# Allegro board ESP333.brd
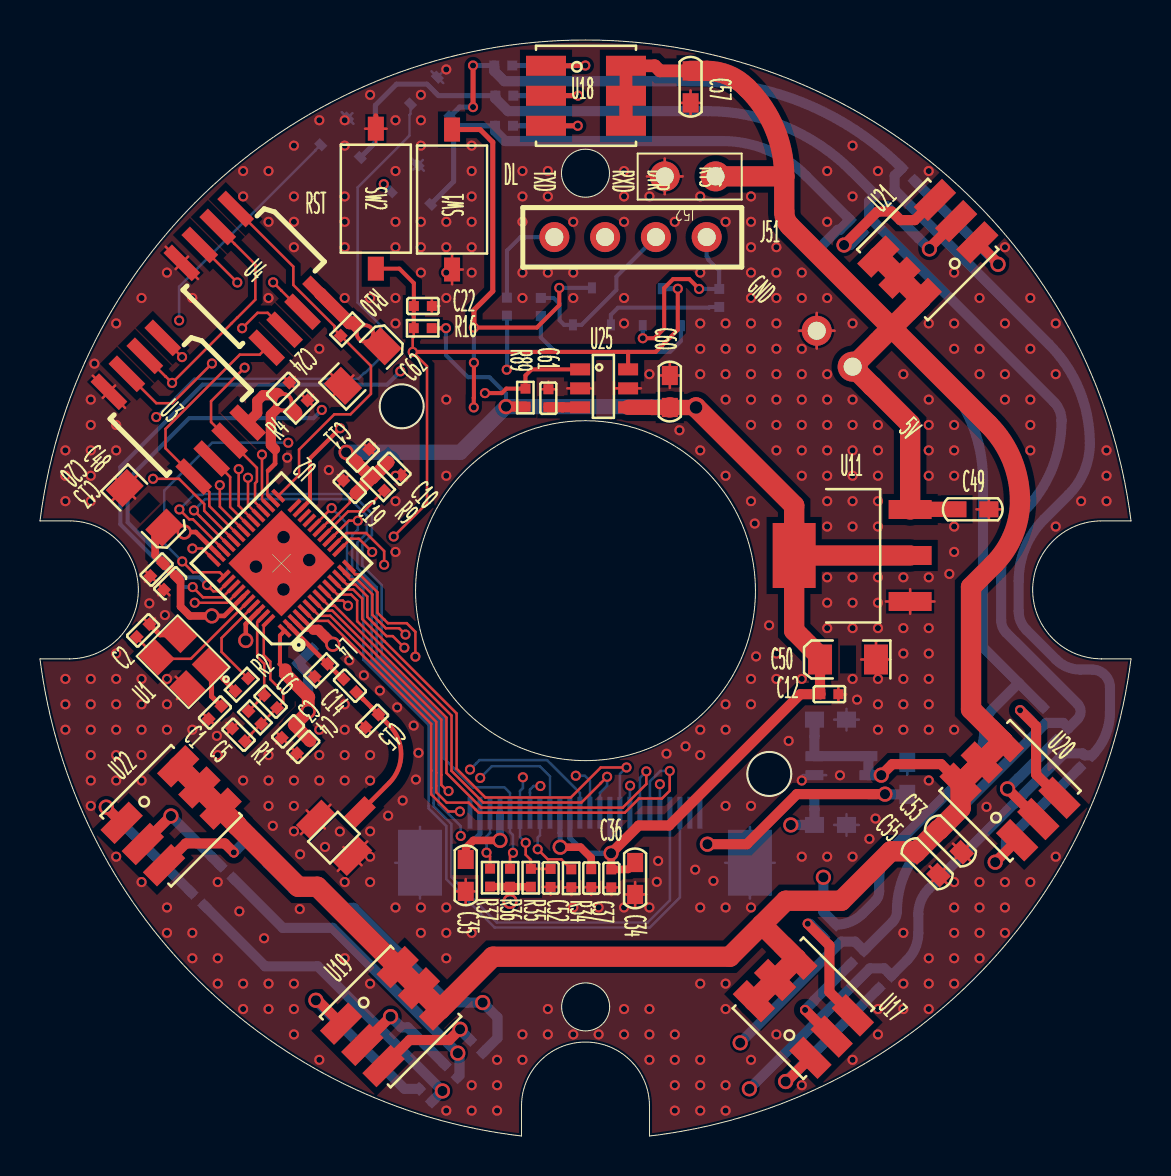
[diagram p0: board, top side]
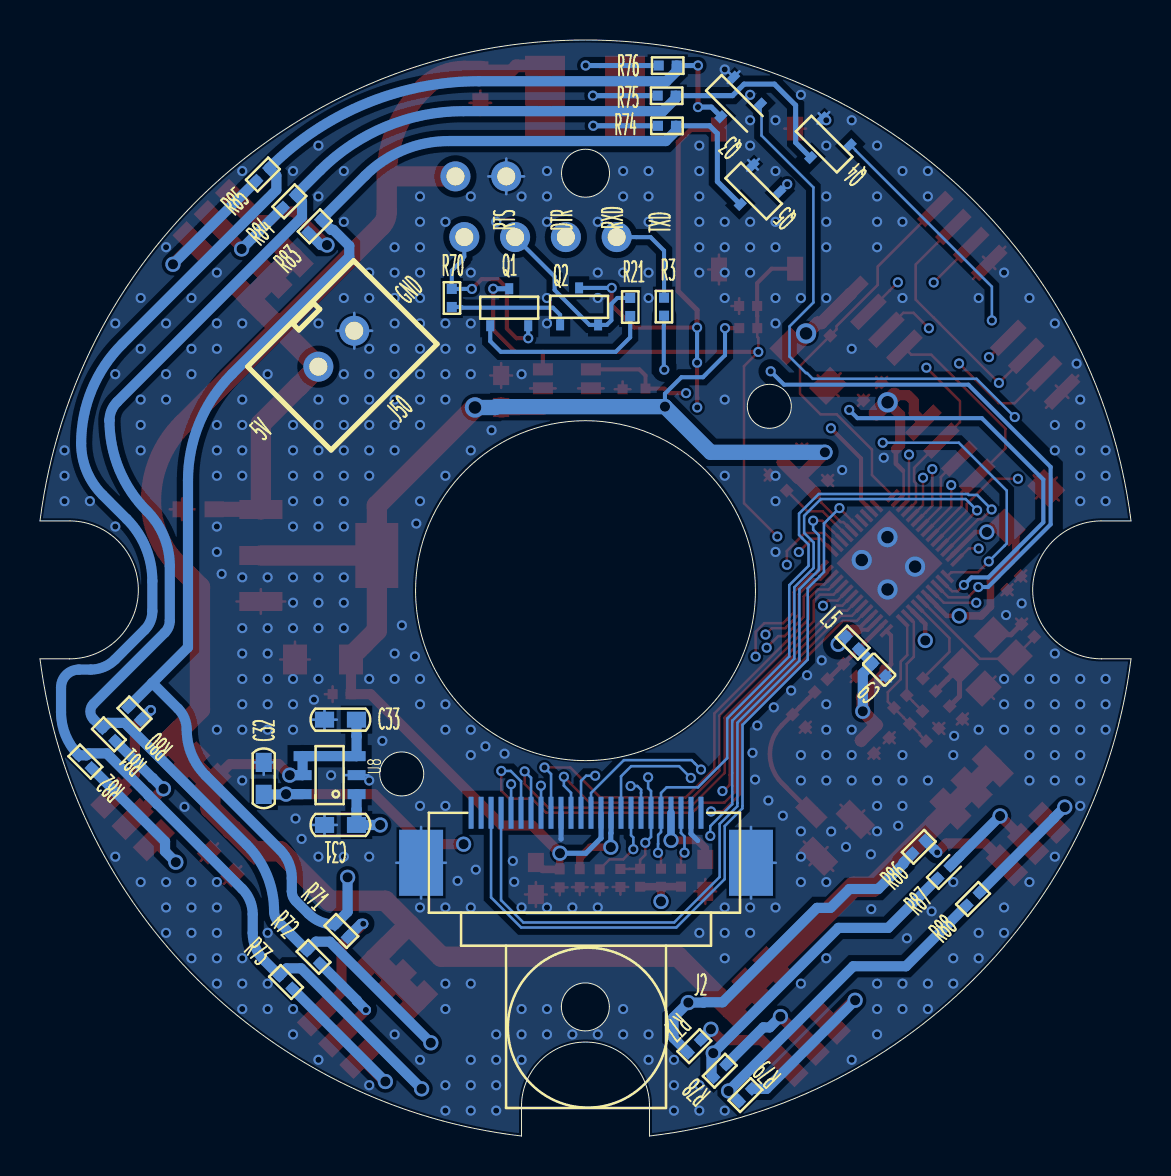
[diagram p1: board, bottom side, seen from below]

Outline 54.57 x 54.81 mm; copper layers: TOP, GND, SIG, BOTTOM. Coordinates in mm from the lower left corner of the outline.
Outline path: circle c18.09,36.49 r1.1 ; circle c27.28,48.15 r1.2 ; circle c36.47,18.11 r1.1 ; 0,30.76 arc(27.28,54.81) 54.57,30.76 53.06,30.76 arc(49.65,27.29) 53.1,23.86 54.57,23.86 arc(46.64,7.78) 30.48,0 30.48,1.5 arc(27.28,4.7) 24.08,1.5 24.08,0 arc(7.93,7.78) 0,23.86 1.47,23.86 arc(4.92,27.29) 1.51,30.76 0,30.76 ; 18.78,27.3 arc(27.28,35.8) 35.78,27.3 arc(27.28,18.8) 18.78,27.3 ; 26.09,6.46 arc(27.29,7.66) 28.49,6.46 arc(27.29,5.26) 26.09,6.46

## Design rules (mm)
net group DTR: nets DTR N16908429
net group RTS: nets N16908427 RTS
net group LED_B: nets LED_B N16960286 N16960785 N16961158 N16961522 N16961899 N16962291
net group LED_G: nets LED_G N16960306 N16960795 N16961160 N16961524 N16961901 N16962293
net group LED_R: nets LED_R N16960332 N16960797 N16961162 N16961526 N16961903 N16962295
net group RF: nets N16860839 N16860948 N16861170 N16861179 N16861214 N16861260 N16861530 N16861598 N16884685

## Placement (name value [footprint] x y rotation side)
C1  GRM1555C1H150JA01D  [C0402]  9.07 21.49 225 top
C2  GRM1555C1H150JA01D  [C0402]  4.84 24.96 45 top
C3  100pF/6.3V(10%)  [C0402]  12.73 20.55 225 top
C4  0.1uF/6.3V(10%)  [C0402]  13.49 19.78 225 top
C5  10nF/6.3V(10%)  [C0402]  10.25 19.75 135 top
C6  3.3nF/6.3V(10%)  [C0402]  11.22 22.04 315 top
C9  0.1uF/6.3V(10%)  [C0402]  12.92 23.64 225 bottom
C10  0.1uF/6.3V(10%)  [C0402]  17.41 33.69 315 top
C11  1uF/10V(20%)  [C0402]  15.83 33.71 45 top
C12  10uF/6.3V(20%)  [C0402]  39.03 22.1 0 top
C13  10uF/6.3V(20%)  [C0402]  6.84 27.96 225 top
C14  LQP15MN3N6B02D  [C0402]  15.19 22.84 314.3 top
C15  GRM1555C1H2R0BA01D  [C0402]  16.29 20.44 45 top
C19  0.1uF/6.3V(10%)  [C0402]  15.81 32.15 135 top
C20  1uF/10V(20%)  [C0402]  6.16 28.65 225 top
C22  1uF/10V(20%)  [C0402]  18.7 41.51 0 top
C24  1uF/10V(20%)  [C0402]  11.84 37.05 45 top
C31  10uF/10V(20%)  [C0603]  40.34 15.56 180 bottom
C32  10uF/10V(20%)  [C0603]  43.38 18.68 270 bottom
C33  10uF/10V(20%)  [C0603]  40.34 20.82 180 bottom
C34  4.7uF/10V(20%)  [C0603]  29.76 13.68 270 top
C35  4.7uF/10V(20%)  [C0603]  21.29 13.83 270 top
C36  0.1uF/16V(10%)  [C0402]  28.57 13.33 270 top
C37  1uF/10V(20%)  [C0402]  27.57 13.34 270 top
C48  47uF/6.3V(20%)  [C1206]  6.22 30.43 315 top
C49  10uF/16V  [C0603]  45.86 31.34 0 top
C50  22uF/16V  [C1206]  39.01 23.83 180 top
C52  1uF/10V(20%)  [C0402]  25.54 13.36 270 top
C53  0.1uF/16V  [C0603]  44.97 15.32 315 top
C55  0.1uF/16V  [C0603]  43.81 14.18 315 top
C57  0.1uF/16V  [C0603]  32.54 53.27 270 top
C60  0.1uF/16V  [C0603]  31.5 36.43 90 top
C61  220nF/6.3V  [C0402]  25.43 36.45 90 top
C62  47uF/10V(20%)  [C1206]  17.13 39.5 45 top
J2  FFC_24P_0P5  [OV9650FSL_PCB]  21.51 16.16 180 bottom
J39  IPEX  [ECT8180001581]  15.98 16.19 135 top
J50  CON2  [XH_2_54_2P]  40.64 38.48 135 bottom
J51  CON4  [CON_2_54_4P]  25.72 44.96 0 top
J52  CON2  [CON_2_54_2P]  33.79 47.99 180 top
L4  GRM1555C1H2R0BA01D  [R0402]  14.38 23.61 225 top
L5  2.0nH  [R0402]  14.25 24.99 225 bottom
Q1  S8050(NPN)  [SOT23-3]  31.1 42.38 180 bottom
Q2  S8050(NPN)  [SOT23-3]  27.6 42.42 180 bottom
Q3  S8050(NPN)  [SOT23-3]  20.51 50.97 45 bottom
Q4  S8050(NPN)  [SOT23-3]  16.02 48.93 45 bottom
Q5  S8050(NPN)  [SOT23-3]  19.54 46.59 45 bottom
R1  20K(5%)  [R0402]  10.43 21.25 315 top
R2  51R(5%)  [R0402]  9.77 22.25 45 top
R3  499R(1%)  [R0402]  23.35 41.03 90 bottom
R4  2K/NC  [R0402]  12.74 36.15 45 top
R9  10K(1%)(NC)  [R0402]  16.58 32.91 315 top
R10  10K(1%)  [R0402]  15.68 40.66 225 top
R16  10K(1%)  [R0402]  19.59 40.4 180 top
R21  12K(1%)  [R0402]  25.05 41.91 270 bottom
R34  10K(1%)  [R0402]  26.57 12.44 90 top
R35  10K(1%)  [R0402]  24.55 12.46 90 top
R36  3.3K(5%)  [R0402]  23.51 13.37 270 top
R37  3.3K(5%)  [R0402]  22.51 13.37 270 top
R70  12K(1%)  [R0402]  33.97 42.36 270 bottom
R71  100  [R0402]  39.82 10.57 225 bottom
R72  100  [R0402]  41.21 9.27 225 bottom
R73  100  [R0402]  42.58 8.02 225 bottom
R74  100  [R0402]  22.76 50.52 0 bottom
R75  100  [R0402]  22.77 52.03 0 bottom
R76  100  [R0402]  22.72 53.54 0 bottom
R77  100  [R0402]  22.15 4.17 135 bottom
R78  100  [R0402]  20.88 2.94 135 bottom
R79  100  [R0402]  19.6 1.72 135 bottom
R80  100  [R0402]  50.16 21.44 225 bottom
R81  100  [R0402]  51.44 20.4 225 bottom
R82  100  [R0402]  52.62 19.04 225 bottom
R83  100  [R0402]  40.51 45.82 315 bottom
R84  100  [R0402]  41.78 47.07 315 bottom
R85  100  [R0402]  43.1 48.41 315 bottom
R86  100  [R0402]  10.93 14.14 135 bottom
R87  100  [R0402]  9.67 12.88 135 bottom
R88  100  [R0402]  8.22 11.53 135 bottom
R89  10K(1%)  [R0402]  24.28 36.48 90 top
SW1  SW PUSHBUTTON  [KEY_3X6]  20.61 43.33 90 top
SW2  SW PUSHBUTTON  [KEY_3X6]  16.8 50.38 270 top
U1  40MHz+/-10ppm  [CRY_3225]  7.38 22.38 135 top
U2  ESP32-D0WD  [SLP48_5X5]  12.08 28.64 135 top
U3  EN25QH128A  [RZ7889]  4.77 34.18 315 top
U4  PSRAM64H  [RZ7889]  8.41 40.63 315 top
U8  RT9011-BM-PJ6  [SOT-23-6]  40.08 18.05 90 bottom
U11  TLV1117-33IDCY  [SOT223]  43.52 26.73 90 top
U17  RGB  [RGB_6]  38.18 6.39 315 top
U18  RGB  [RGB_6]  27.31 52.02 180 top
U19  RGB  [RGB_6]  17.53 5.97 225 top
U20  RGB  [RGB_6]  48.52 17.27 315 top
U21  RGB  [RGB_6]  44.4 44.34 45 top
U22  RGB  [RGB_6]  6.56 16.02 225 top
U25  TPS3813K33DBVT  [SOT23-6]  27.01 38.34 0 top

## Library data of the parts
C1-C6 C9-C15 C19 C20 C22 C24 C31-C37 C48-C50 C52 C53 C55 C57 C60-C62 = CAP NP
J2 = CON24_4
J39 = IPEX_0
J50 J52 = CON2
J51 = CON4
L4 L5 = CHOKE
Q1-Q5 = NPN BCE_2
R1-R4 R9 R10 = RESISTOR
R16 R89 = RESISTOR_0: signal model: DEFAULT_RESISTOR_10000OHM_1_2
R21 R34-R37 R70-R88 = RESISTOR_0: signal model: DEFAULT_RESISTOR_200OHM_1_2
SW1 = SW PUSHBUTTON_0
SW2 = SW PUSHBUTTON
U1 = X1_1
U2 = ESP8080_24
U3 = FLASH_3
U4 = PN18S32
U8 = NCP1117_3
U11 = TLV1117-33IDCY
U17-U22 = LED_RGB
U25 = TPS3813K33DBVT

## Footprints (pads in the part's own frame, mm; a bottom-side part is the same pattern mirrored in y, then rotated)
C0402
  rect 0.5x0.5 smd: 1(0,0) 2(0.9,0)
C0603
  rect 0.96x0.8 smd: 1(0,0) 2(1.6,0)
C1206
  rect 1.2x1.5 smd: 1(0,0) 2(-2.8,0)
CON_2_54_2P
  round 1.5 hole 0.9: 1(0,0) 2(2.54,0)
CON_2_54_4P
  round 1.5 hole 0.9: 1(0,0) 2(2.54,0) 3(5.08,0) 4(7.62,0)
CRY_3225
  rect 1.4x1.2 smd: 1(0,-1.6) 2(2.2,-1.6) 3(2.2,0) 4(0,0)
ECT8180001581
  rect 0.8x1.5 smd: 1(0,0)
  rect 1x1.8 smd: 2(-1.3,1.8) 3(1.3,1.8)
KEY_3X6
  rect 1.2x0.8 smd: 1(0,0) 2(7,0)
OV9650FSL_PCB
  rect 0.25x1.6 smd: 1(0,0) 2(-0.5,0) 3(-1,0) 4(-1.5,0) 5(-2,0) 6(-2.5,0) 7(-3,0) 8(-3.5,0) 9(-4,0) 10(-4.5,0) 11(-5,0) 12(-5.5,0) 13(-6,0) 14(-6.5,0) 15(-7,0) 16(-7.5,0) 17(-8,0) 18(-8.5,0) 19(-9,0) 20(-9.5,0) 21(-10,0) 22(-10.5,0) 23(-11,0) 24(-11.5,0)
  rect 2.2x3.3 smd: 25(-14,-2.5) 26(2.5,-2.5)
R0402
  rect 0.5x0.5 smd: 1(0,0) 2(0.9,0)
RGB_6
  rect 2x1 smd: 1(2,-1.5) 2(2,0) 3(2,1.5) 4(-2,1.5) 5(-2,0) 6(-2,-1.5)
RZ7889
  rect 2x0.6 smd: 1(-3.082,5.025) 2(-3.082,3.755) 3(-3.082,2.485) 4(-3.082,1.215) 5(2.918,1.215) 6(2.918,2.485) 7(2.918,3.755) 8(2.918,5.025)
SLP48_5X5
  rect 0.8x0.2 smd: 1(-2.5,2.275) 2(-2.5,1.925) 3(-2.5,1.575) 4(-2.5,1.225) 5(-2.5,0.875) 6(-2.5,0.525) 7(-2.5,0.175) 8(-2.5,-0.175) 9(-2.5,-0.525) 10(-2.5,-0.875) 11(-2.5,-1.225) 12(-2.5,-1.575) 13(-2.5,-1.925) 14(-2.5,-2.275) 25(2.5,-2.275) 26(2.5,-1.925) 27(2.5,-1.575) 28(2.5,-1.225) 29(2.5,-0.875) 30(2.5,-0.525) 31(2.5,-0.175) 32(2.5,0.175) 33(2.5,0.525) 34(2.5,0.875) 35(2.5,1.225) 36(2.5,1.575) 37(2.5,1.925) 38(2.5,2.275)
  rect 0.2x0.8 smd: 15(-1.575,-2.5) 16(-1.225,-2.5) 17(-0.875,-2.5) 18(-0.525,-2.5) 19(-0.175,-2.5) 20(0.175,-2.5) 21(0.525,-2.5) 22(0.875,-2.5) 23(1.225,-2.5) 24(1.575,-2.5) 39(1.575,2.5) 40(1.225,2.5) 41(0.875,2.5) 42(0.525,2.5) 43(0.175,2.5) 44(-0.175,2.5) 45(-0.525,2.5) 46(-0.875,2.5) 47(-1.225,2.5) 48(-1.575,2.5)
  rect 3.75x3.75 smd: 49(0,0)
SOT23-3
  rect 0.4x0.55 smd: 1(-0.95,-1.85) 2(0.95,-1.85) 3(0,0)
SOT23-6
  rect 1x0.6 smd: 1(0,0) 2(0,-0.95) 3(0,-1.9) 4(2.4,-1.9) 5(2.4,-0.95) 6(2.4,0)
SOT223
  rect 0.95x2.15 smd: 1(0,0) 2(2.3,0) 3(4.6,0)
  rect 3.25x2.15 smd: 4(2.3,5.8)
SOT-23-6
  rect 0.5x0.9 smd: 1(-0.95,-1.35) 2(0,-1.35) 3(0.95,-1.35) 4(0.95,1.35) 5(0,1.35) 6(-0.95,1.35)
XH_2_54_2P
  round 1.5 hole 0.9: 1(0,0) 2(2.54,0)

## Nets
AGND: C1.2 C2.2 C3.2 C4.2 C5.2 C9.2 C10.2 C11.2 C12.2 C13.2 C15.1 C19.2 C20.2 C22.2 C24.2 C31.1 C32.1 C33.1 C34.2 C35.2 C36.2 C37.2 C48.2 C49.2 C50.2 C52.2 C53.2 C55.2 C57.2 C60.2 C61.2 C62.2 J2.2(AGND) J2.15(DGND) J2.25(GND#25) J2.26(GND#26) J39.2(GND1) J39.3(GND2) J50.2 J52.2 L4.2 Q3.2(E) Q4.2(E) Q5.2(E) R4.2 R34.1 SW1.1 SW2.1 U1.2(GND#2) U1.4(GND#4) U2.49(GND) U3.4(GND) U4.4(VSS) U8.2(GND) U11.1(ADJ/GND) U25.2(GND) U25.5(WDR)
AVDD_2V8: C31.2 C35.1 J2.4(AVDD) U8.1(VOUT2)
DVDD_1V3: C32.2 C37.1 J2.10(DVDD) U8.6(VOUT1)
VBUS: C33.2 C49.1 C53.1 C55.1 C57.1 J50.1 J52.1 U8.3(EN2) U8.4(EN1) U8.5(VIN) U11.3(INPUT) U17.4(BA) U17.5(GA) U17.6(RA) U18.4(BA) U18.5(GA) U18.6(RA) U19.4(BA) U19.5(GA) U19.6(RA) U20.4(BA) U20.5(GA) U20.6(RA) U21.4(BA) U21.5(GA) U21.6(RA) U22.4(BA) U22.5(GA) U22.6(RA)
VDD_SDIO: C24.1 C62.1 R4.1 R10.1 U2.26(VDD_SDIO) U3.8(VCC) U4.8(VDD)
B: Q5.1(B) U2.34(GPIO5)
CAM_RESET: C52.1 J2.6(RESET) R35.2 U2.13(32K_XN)
DOVDD_3V3: C3.1 C4.1 C9.1 C10.1 C11.1 C12.1 C13.1 C19.1 C20.1 C34.1 C36.1 C48.1 C50.1 C60.1 J2.11(DOVDD) L5.2 R9.1 R16.1 R35.1 R36.2 R37.2 R89.1 U2.1(VDDA#1) U2.19(VDD3P3_RTC) U2.37(VDD3P3_CPU) U2.43(VDDA#43) U2.46(VDDA#46) U11.2(OUTPUT#2) U11.4(OUTPUT#4) U25.4(VCC)
DTR: J51.3 Q2.2(E) R21.1
DVP_HREF: J2.9(HREF) U2.5(SENSOR_VP)
DVP_PCLK: J2.17(PCLK) U2.12(32K_XP)
DVP_VSYNC: J2.7(VSYNC) U2.15(GPIO26)
DVP_Y2: J2.19(Y2) U2.6(SENSOR_CAPP)
DVP_Y3: J2.21(Y3) U2.17(MTMS)
DVP_Y4: J2.22(Y4) U2.20(MTCK)
DVP_Y5: J2.20(Y5) U2.16(GPIO27)
DVP_Y6: J2.18(Y6) U2.8(SENSOR_VN)
DVP_Y7: J2.16(Y7) U2.11(VDET_2)
DVP_Y8: J2.14(Y8) U2.10(VDET_1)
DVP_Y9: J2.12(Y9) U2.7(SENSOR_CAPN)
EN: C22.1 Q1.3(C) R16.2 SW2.2 U2.9(CHIP_PU) U25.6(R\E\S\E\T\)
FLASH_CLK: U2.31(SD_CLK) U3.6(CLK)
G: Q4.1(B) U2.38(GPIO19)
I2C_SCL: J2.5(SCL) R36.1 U2.36(GPIO23)
I2C_SDA: J2.3(SDA) R37.1 U2.35(GPIO18)
IO0: Q2.3(C) SW1.2 U2.23(GPIO0)
IO4: U2.24(GPIO4)
IO12: R9.2 U2.18(MTDI)
IO16: R10.2 U2.25(GPIO16) U4.1(CS#)
IO17: U2.27(GPIO17) U4.6(SCLK)
IO21: Q3.1(B) U2.42(GPIO21)
IO25: J2.13(XCLK) U2.14(GPIO25)
LED_B: Q5.3(C) R71.1 R74.1 R77.1 R80.1 R83.1 R86.1
LED_G: Q4.3(C) R72.1 R75.1 R78.1 R81.1 R84.1 R87.1
LED_R: Q3.3(C) R73.1 R76.1 R79.1 R82.1 R85.1 R88.1
PWDN: J2.8(PWDN) R34.2
RTS: J51.4 Q1.2(E) R70.1
RXD0: J51.2 U2.40(U0RXD)
SCS/CMD: U2.30(SD_CMD) U3.1(/CS)
SDI/SD1: U2.33(SD_DATA_1) U3.5(DI) U4.5(SI/SIO0)
SDO/SD0: U2.32(SD_DATA_0) U3.2(DO) U4.2(SO/SIO1)
SHD/SD2: U2.28(SD_DATA_2) U3.7(/HOLD) U4.7(SIO3)
SWP/SD3: U2.29(SD_DATA_3) U3.3(/WP) U4.3(SIO2)
TXD0: J51.1 R3.2
WDI: R89.2 U2.39(GPIO22) U25.1(WDI)
N16860839: C5.1 C6.2 R1.2 U2.48(CAP1)
N16860948: L5.1 U2.3(VDD3P3#3) U2.4(VDD3P3#4)
N16861170: C14.2 C15.2 J39.1(RF)
N16861179: C2.1 U1.3(XOUT) U2.44(XTAL_N)
N16861214: C1.1 R2.1 U1.1(XIN)
N16861260: C6.1 R1.1 U2.47(CAP2)
N16861530: R3.1 U2.41(U0TXD)
N16861598: R2.2 U2.45(XTAL_P)
N16884685: C14.1 L4.1 U2.2(LNA_IN)
N16908427: Q2.1(B) R70.2
N16908429: Q1.1(B) R21.2
N16960286: R71.2 U17.3(BK)
N16960306: R72.2 U17.2(GK)
N16960332: R73.2 U17.1(RK)
N16960785: R74.2 U18.3(BK)
N16960795: R75.2 U18.2(GK)
N16960797: R76.2 U18.1(RK)
N16961158: R77.2 U19.3(BK)
N16961160: R78.2 U19.2(GK)
N16961162: R79.2 U19.1(RK)
N16961522: R80.2 U20.3(BK)
N16961524: R81.2 U20.2(GK)
N16961526: R82.2 U20.1(RK)
N16961899: R83.2 U21.3(BK)
N16961901: R84.2 U21.2(GK)
N16961903: R85.2 U21.1(RK)
N16962291: R86.2 U22.3(BK)
N16962293: R87.2 U22.2(GK)
N16962295: R88.2 U22.1(RK)
N16988764: C61.1 U25.3(WDT)

Pads without a net: J2 1 23 24; U2 21 22

## Via types
v1: diameter 0.508, hole 0.305, TOP to BOTTOM, 466 vias
v2: diameter 0.762, hole 0.508, TOP to BOTTOM, 32 vias
v3: diameter 1.016, hole 0.635, TOP to BOTTOM, 7 vias

## Routing (per net, layer and track width the routed paths; a pad name or vN(x,y) marks a point on that pad's centre or on a via; arc(x,y) is an arc through that point)
AGND: length 130.4
  TOP w0.127: 46.84,31.34 C49.2 ; C49.2 47.46,31.88 ; C49.2 48.08,31.34 ; C49.2 47.46,30.8 ; SW1.1 21.15,43.33 ; SW1.1 20.61,44.07 ; SW1.1 20.61,42.6 ; C53.2 46.48,14.57 ; C53.2 46.54,13.75 ; C53.2 45.66,14.63 ; C53.2 45.72,13.81 ; C36.2 28.96,12.43 ; C36.2 28.18,12.43 ; C36.2 28.57,12.04 ; 26.37,37.39 U25.2 27.65,37.39 ; 6.78,43.36 U4.4 ; U4.4 6.29,44.47 ; U4.4 7.9,42.86 ; U4.4 7.4,43.98 ; 5.75,25.87 C2.2 5.2,25.87 ; 27.18,12.44 C37.2 ; C37.2 27.57,12.06 ; C37.2 27.96,12.44 ; C48.2 4.76,31.88 ; C48.2 3.61,31.78 ; C48.2 3.71,32.93 ; C48.2 4.87,33.04 ; 42.3,26.73 U11.1 ; U11.1 44.73,26.73 ; U11.1 43.52,27.35 ; U11.1 43.52,26.12 ; 5.92,27.6 C13.2 ; C13.2 6.47,27.05 ; C13.2 5.92,27.05 ; 44.55,12.67 C55.2 ; C55.2 45.37,12.61 ; C55.2 45.32,13.43 ; C55.2 44.5,13.49 ; C50.2 42.55,23.83 ; C50.2 41.81,24.72 ; C50.2 41.07,23.83 ; C50.2 41.81,22.94 ; C22.2 19.99,41.51 ; C22.2 19.6,41.12 ; C22.2 19.6,41.9 ; 25.15,12.46 C52.2 ; C52.2 25.54,12.07 ; C52.2 25.93,12.46 ; 9.34,20.66 C5.2 ; C5.2 9.34,20.11 ; C5.2 9.89,20.66 ; J39.2 16.36,14.73 ; J39.2 16.08,13.54 ; J39.2 14.89,13.26 ; J39.2 15.18,14.45 ; C24.2 12.75,37.41 ; C24.2 12.2,37.96 ; C24.2 12.75,37.96 ; C11.2 16.74,34.08 ; C11.2 16.19,34.63 ; C11.2 16.74,34.63 ; C19.2 15.45,33.06 ; C19.2 14.9,33.06 ; C19.2 14.9,32.51 ; R4.2 13.65,36.51 ; R4.2 13.65,37.07 ; R4.2 13.1,37.07 ; 30.36,47.99 J52.2 ; J52.2 32.14,47.99 ; J52.2 31.25,47.1 ; J52.2 31.25,48.88 ; 14.01,22.7 L4.2 13.46,23.25 ; C1.2 8.71,20.58 ; C1.2 8.16,21.13 ; C1.2 8.16,20.58 ; 18.32,33.33 C10.2 18.32,32.78 ; 30.05,37.39 U25.5 28.77,37.39 ; C4.2 13.13,18.86 ; C4.2 12.58,18.86 ; C4.2 12.58,19.42 ; 26.18,12.44 R34.1 ; R34.1 26.96,12.44 ; R34.1 26.57,12.05 ; 20.75,12.23 C35.2 ; C35.2 21.83,12.23 ; C35.2 21.29,11.61 ; C35.2 21.29,12.85 ; J39.3 14.24,15.38 ; J39.3 13.06,15.1 ; J39.3 14.53,16.57 ; J39.3 13.34,16.29 ; C57.2 33.08,51.67 ; C57.2 32.54,51.05 ; C57.2 32,51.67 ; C57.2 32.54,52.29 ; 30.96,38.03 C60.2 ; C60.2 31.5,38.65 ; C60.2 31.5,37.41 ; C60.2 32.04,38.03 ; U3.4 3.76,37.53 ; U3.4 4.25,36.42 ; U3.4 2.64,38.03 ; U3.4 3.14,36.91 ; 37.96,40.27 J50.2 ; J50.2 38.85,39.38 ; J50.2 39.74,40.27 ; J50.2 38.85,41.16 ; 5.24,27.73 C20.2 ; C20.2 5.8,27.73 ; C20.2 5.24,28.29 ; C12.2 39.93,22.49 ; C12.2 39.93,21.71 ; C12.2 40.32,22.1 ; 6.78,22.98 U1.4 6.85,21.86 ; C3.2 12.37,19.64 ; C3.2 11.82,19.64 ; C3.2 11.82,20.19 ; 29.76,11.46 C34.2 ; C34.2 30.3,12.08 ; C34.2 29.76,12.7 ; C34.2 29.22,12.08 ; C62.2 15.68,38.04 ; C62.2 14.52,38.15 ; C62.2 14.63,36.99 ; 16.8,49.64 SW2.1 ; SW2.1 16.26,50.38 ; SW2.1 17.34,50.38 ; C15.1 16.57,20.17 ; C15.1 16.01,20.17 ; C15.1 16.01,20.72 ; 25.04,37.35 C61.2 ; C61.2 25.43,37.74 ; C61.2 25.82,37.35
  TOP w0.254: U1.2 6,25.07 C2.2 ; 16.8,51.02 SW2.1
  GND w0.127: 31.25,47.1 J52.2 ; J52.2 30.36,47.99 ; J52.2 32.14,47.99 ; J52.2 31.25,48.88 ; 37.96,40.27 J50.2 ; J50.2 38.85,41.16 ; J50.2 38.85,39.38 ; J50.2 39.74,40.27
  SIG w0.127: J50.2 38.85,41.16 ; J50.2 38.85,39.38 ; J50.2 37.96,40.27 ; J50.2 39.74,40.27 ; J52.2 31.25,48.88 ; J52.2 32.14,47.99 ; J52.2 30.36,47.99 ; J52.2 31.25,47.1
  BOTTOM w0.127: 39.72,15.56 C31.1 ; C31.1 40.34,15.02 ; C31.1 40.34,16.1 ; C31.1 40.95,15.56 ; J2.26 19.01,15.45 ; J2.26 17.77,13.66 ; J2.26 19.01,11.88 ; C33.1 40.96,20.82 ; C33.1 40.34,21.36 ; C33.1 40.34,20.28 ; C33.1 39.72,20.82 ; Q5.2 19.15,48.81 ; Q5.2 19.2,48.28 ; Q5.2 18.66,48.33 ; Q5.2 18.61,48.86 ; 34.27,13.66 J2.25 ; J2.25 36.75,13.66 ; J2.25 35.51,11.88 ; J2.25 35.51,15.45 ; 42.84,18.68 C32.1 ; C32.1 43.91,18.68 ; C32.1 43.38,18.06 ; Q4.2 15.68,50.62 ; Q4.2 15.62,51.15 ; Q4.2 15.09,51.21 ; 39.32,18.05 U8.2 38.14,18.05 ; 38.85,39.38 J50.2 ; J50.2 38.85,41.16 ; J50.2 37.96,40.27 ; J50.2 39.74,40.27 ; J52.2 31.25,48.88 ; J52.2 31.25,47.1 ; J52.2 30.36,47.99 ; J52.2 32.14,47.99 ; Q3.2 20.11,53.19 ; Q3.2 20.17,52.66 ; Q3.2 19.58,53.25 ; 12,23.28 C9.2 ; C9.2 12.55,22.73 ; C9.2 12,22.73
  BOTTOM w0.254: J2.2 22.01,15.11 21.67,14.77 ; 28.5,14.85 28.51,14.86 J2.15
  BOTTOM w0.381: C32.1 43.38,18.86
  vias: v1(1.27,34.29) v1(1.27,33.02) v1(1.27,31.75) v1(1.27,22.86) v1(1.27,21.59) v1(1.27,20.32) v1(2.54,36.83) v1(2.54,35.56) v1(2.54,34.29) v1(2.54,33.02) v1(2.54,31.75) v1(2.54,22.86) v1(2.54,21.59) v1(2.54,20.32) v1(2.54,19.05) v1(2.54,17.78) v1(2.54,16.51) v1(2.72,38.63) v1(3.81,40.64) v1(3.81,35.56) v1(3.81,34.29) v1(3.81,24.13) v1(3.81,22.86) v1(3.81,21.59) v1(3.81,20.32) v1(3.81,19.05) v1(3.81,17.78) v1(3.81,13.97) v1(5.08,41.91) v1(5.08,22.86) v1(5.08,21.59) v1(5.08,20.32) v1(5.08,19.05) v1(5.08,17.78) v1(5.08,12.7) v1(5.47,26.64) v1(6.25,26.05) v1(6.35,43.18) v1(6.35,22.86) v1(6.35,21.59) v1(6.35,20.32) v1(6.35,11.43) v1(6.35,10.16) v1(7.62,41.91) v1(7.62,20.32) v1(7.62,10.16) v1(7.62,8.89) v1(8.85,20.01) v1(8.89,19.05) v1(8.89,12.7) v1(8.89,8.89) v1(8.89,7.62) v1(9.97,11.24) v1(10.16,48.26) v1(10.16,46.99) v1(10.16,17.78) v1(10.16,7.62) v1(10.16,6.35) v1(11.21,9.89) v1(11.43,48.26) v1(11.43,45.72) v1(11.43,41.91) v1(11.43,19.05) v1(11.43,17.78) v1(11.43,16.51) v1(11.43,7.62) v1(11.43,6.35) v1(11.64,15.51) v1(12.37,33.92) v1(12.7,49.53) v1(12.7,46.99) v1(12.7,45.72) v1(12.7,44.45) v1(12.7,17.78) v1(12.7,16.51) v1(12.7,15.24) v1(12.7,7.62) v1(12.7,6.35) v1(12.7,5.08) v1(13.01,14.09) v1(12.99,11.35) v1(13.97,50.8) v1(13.97,39.37) v1(13.97,20.32) v1(13.97,19.05) v1(13.97,17.78) v1(13.97,3.81) v1(14.25,14.46) v1(14.45,33.31) v1(15,15.23) v1(15.24,50.8) v1(15.24,49.53) v1(15.24,46.99) v1(15.24,45.72) v1(15.24,44.45) v1(15.24,41.91) v1(15.24,21.59) v1(15.24,20.32) v1(15.24,19.05) v1(15.24,17.78) v1(15.24,12.7) v1(15.24,8.89) v1(15.47,23.79) v1(16.2,23.04) v1(16.51,52.07) v1(16.51,41.91) v1(16.51,19.05) v1(16.51,17.78) v1(16.51,15.24) v1(16.51,13.97) v1(16.51,12.7) v1(16.51,7.62) v1(17,22.28) v1(17.41,16.02) v1(17.78,50.8) v1(17.78,48.26) v1(17.78,45.72) v1(17.78,44.45) v1(17.78,41.91) v1(17.78,40.64) v1(17.78,33.02) v1(17.78,31.75) v1(17.78,29.21) v1(17.78,11.43) v1(17.87,21.44) v1(18.14,16.78) v1(18.69,20.53) v1(18.8,17.83) v1(18.93,19.16) v1(19.05,52.07) v1(19.05,50.8) v1(19.05,49.53) v1(19.05,45.72) v1(19.05,44.45) v1(19.05,43.18) v1(19.05,11.43) v1(19.05,10.16) v1(20.32,53.34) v1(20.32,45.72) v1(20.32,44.45) v1(20.32,43.18) v1(20.32,41.91) v1(20.32,36.83) v1(20.32,33.02) v1(20.32,11.43) v1(20.32,10.16) v1(20.32,8.89) v1(20.32,1.27) v1(21.59,49.53) v1(21.59,48.26) v1(21.59,46.99) v1(21.59,45.72) v1(21.59,44.45) v1(21.59,43.18) v1(21.59,10.16) v1(21.59,2.54) v1(21.59,1.27) v1(22.86,3.81) v1(22.86,2.54) v1(22.86,1.27) v1(24.13,48.26) v1(24.13,46.99) v1(24.13,45.72) v1(24.13,43.18) v1(24.13,41.91) v1(24.13,5.08) v1(24.13,3.81) v1(25.4,48.26) v1(25.4,46.99) v1(25.4,43.18) v1(25.4,6.35) v1(25.4,5.08) v1(26.67,45.72) v1(26.67,43.18) v1(26.67,41.91) v1(26.67,11.43) v1(26.67,5.08) v1(27.94,11.43) v1(27.94,5.08) v1(29.21,48.26) v1(29.21,46.99) v1(29.21,45.72) v1(29.21,41.91) v1(29.21,40.64) v1(29.21,11.43) v1(29.21,6.35) v1(29.21,5.08) v1(30.48,46.99) v1(30.48,38.1) v1(30.48,11.43) v1(30.48,6.35) v1(30.48,5.08) v1(30.48,3.81) v1(30.92,13.76) v1(30.85,12.71) v1(31.33,19.12) v1(31.75,45.72) v1(31.75,5.08) v1(31.75,3.81) v1(31.75,2.54) v1(31.75,1.27) v1(31.98,35.3) v1(32.29,19.49) v1(32.77,13.32) v1(33.02,46.99) v1(33.02,43.18) v1(33.02,40.64) v1(33.02,39.37) v1(33.02,38.1) v1(33.02,34.29) v1(33.02,20.32) v1(33.02,19.05) v1(33.02,11.43) v1(33.02,7.62) v1(33.02,3.81) v1(33.02,2.54) v1(33.02,1.27) v1(33.68,12.76) v1(34.29,45.72) v1(34.29,40.64) v1(34.29,39.37) v1(34.29,38.1) v1(34.29,36.83) v1(34.29,33.02) v1(34.29,21.59) v1(34.29,20.32) v1(34.29,16.51) v1(34.29,11.43) v1(34.29,7.62) v1(34.29,6.35) v1(34.29,2.54) v1(34.29,1.27) v1(35.56,46.99) v1(35.56,45.72) v1(35.56,44.45) v1(35.56,43.18) v1(35.56,41.91) v1(35.56,40.64) v1(35.56,39.37) v1(35.56,38.1) v1(35.56,36.83) v1(35.56,35.56) v1(35.56,31.75) v1(35.56,22.86) v1(35.56,21.59) v1(35.56,16.51) v1(35.56,11.43) v1(35.56,3.81) v1(35.75,30.63) v1(35.81,23.99) v1(36.47,25.54) v1(36.83,44.45) v1(36.83,43.18) v1(36.83,41.91) v1(36.83,40.64) v1(36.83,39.37) v1(36.83,38.1) v1(36.83,36.83) v1(36.83,35.56) v1(36.83,34.29) v1(36.83,24.13) v1(36.83,22.86) v1(36.83,5.08) v1(37.44,19.76) v1(38.1,43.18) v1(38.1,41.91) v1(38.1,39.37) v1(38.1,38.1) v1(38.1,36.83) v1(38.1,35.56) v1(38.1,34.29) v1(38.1,33.02) v1(38.1,22.86) v1(38.1,17.78) v1(38.1,13.97) v1(38.1,2.54) v1(39.37,48.26) v1(39.37,45.72) v1(39.37,41.91) v1(39.37,38.1) v1(39.37,36.83) v1(39.37,35.56) v1(39.37,34.29) v1(39.37,33.02) v1(39.37,31.75) v1(39.37,30.48) v1(39.37,27.94) v1(39.37,26.67) v1(39.37,25.4) v1(39.37,13.97) v1(40.01,18.04) v1(40.64,49.53) v1(40.64,46.99) v1(40.64,40.64) v1(40.64,36.83) v1(40.64,35.56) v1(40.64,34.29) v1(40.64,33.02) v1(40.64,31.75) v1(40.64,30.48) v1(40.64,27.94) v1(40.64,26.67) v1(40.64,25.4) v1(40.64,22.86) v1(40.64,13.97) v1(40.64,3.81) v1(40.86,21.82) v1(41.48,14.86) v1(41.79,15.88) v1(41.91,48.26) v1(41.91,35.56) v1(41.91,34.29) v1(41.91,33.02) v1(41.91,31.75) v1(41.91,30.48) v1(41.91,27.94) v1(41.91,26.67) v1(41.91,25.4) v1(41.91,22.86) v1(41.91,21.59) v1(41.91,20.32) v1(41.91,6.35) v1(41.91,5.08) v1(43.18,38.1) v1(43.18,27.94) v1(43.18,25.4) v1(43.18,24.13) v1(43.18,22.86) v1(43.18,21.59) v1(43.18,20.32) v1(43.18,10.16) v1(43.18,7.62) v1(43.18,6.35) v1(44.45,48.26) v1(44.45,40.64) v1(44.45,36.83) v1(44.45,35.56) v1(44.45,34.29) v1(44.45,33.02) v1(44.45,27.94) v1(44.45,25.4) v1(44.45,24.13) v1(44.45,22.86) v1(44.45,21.59) v1(44.45,20.32) v1(44.45,17.78) v1(44.45,8.89) v1(44.45,7.62) v1(44.45,6.35) v1(45.48,28.11) v1(45.72,43.18) v1(45.72,40.64) v1(45.72,39.37) v1(45.72,35.56) v1(45.72,34.29) v1(45.72,33.02) v1(45.72,30.48) v1(45.72,29.21) v1(45.72,20.32) v1(45.72,12.7) v1(45.72,11.43) v1(45.72,10.16) v1(45.72,8.89) v1(45.72,7.62) v1(46.99,41.91) v1(46.99,39.37) v1(46.99,38.1) v1(46.99,12.7) v1(46.99,11.43) v1(46.99,10.16) v1(46.99,8.89) v1(47.34,16.46) v1(48.26,44.45) v1(48.26,40.64) v1(48.26,38.1) v1(48.26,36.83) v1(48.26,12.7) v1(48.26,11.43) v1(48.26,10.16) v1(49.53,41.91) v1(49.53,39.37) v1(49.53,36.83) v1(49.53,35.56) v1(49.53,34.29) v1(49.53,12.7) v1(50.8,40.64) v1(50.8,38.1) v1(50.8,30.48) v1(50.8,13.97) v1(52.07,31.75) v1(53.34,34.29) v1(53.34,33.02) v1(53.34,31.75) v3(10.8,28.48) v3(12.18,29.95) v3(12.18,27.33) v3(13.47,28.81)
AVDD_2V8: length 21.4
  TOP w0.381: v2(23,14.78) 21.67,14.78 21.29,14.4 C35.1
  SIG w0.508: v2(37.55,15.56) 23.78,15.56 v2(23,14.78)
  BOTTOM w0.381: v2(23,14.78) 23.01,14.79 J2.4
  BOTTOM w0.508: U8.1 38.73,16.34 38.74,16.34 C31.2 v2(37.55,15.56)
DVDD_1V3: length 23.6
  TOP w0.381: C37.1 27.57,13.91 27.04,14.45 v2(26.02,14.45)
  TOP w0.508: v2(33.38,14.59) 35.35,14.59 37.86,17.1 v2(42.26,17.1)
  SIG w0.381: v2(33.38,14.59) 32.68,14.59 32.34,14.94 26.51,14.94 v2(26.02,14.45)
  BOTTOM w0.254: J2.10 26.01,15.16 26.02,15.15 v2(26.02,14.45)
  BOTTOM w0.508: C32.2 42.27,17.08 v2(42.26,17.1) U8.6
VBUS: length 143.9
  TOP w0.508: U20.6 45.07,18.6 42.63,18.6 v2(42.08,18.05)
  TOP w0.635: C57.1 31.01,53.27 30.75,53.52 U18.6 U18.5 ; U18.5 U18.4 U18.5
  TOP w0.762: C49.1 43.53,31.34 U11.3
  TOP w1.016: 37.22,47.99 37.22,46.22 arc(37.3,45.83) 37.52,45.5 42.6,40.42 ; 37.22,47.99 J52.1 ; 37.22,47.99 arc(36.75,50.36) 35.41,52.37 35.33,52.45 arc(34.42,53.06) 33.35,53.27 C57.1 ; U20.4 46.57,21.34 46.57,27.46 47.69,28.59 arc(48.67,30.05) 49.01,31.77 arc(48.6,33.83) 47.44,35.58 42.6,40.42 ; U20.4 47.1,18.68 ; U20.4 U20.5 ; U22.6 U22.5 U22.4 9.84,15.57 9.84,15.54 12.91,12.46 13.87,12.46 U19.6 U19.5 U19.4 22.65,8.97 34.5,8.97 36.11,10.57 ; 47.1,18.68 U20.6 ; 47.1,18.68 U20.6 ; 47.1,18.68 U20.5 ; 47.1,18.68 U20.5 ; U21.4 U21.5 U21.6 42.6,40.42 ; U20.6 46.04,16.39 C53.1 44.94,15.32 C55.1 43.75,14.24 42.55,14.24 40.07,11.76 37.3,11.76 36.11,10.57 ; 42.6,40.42 42.58,40.42 J50.1 41.62,37.5 41.63,37.5 43.52,35.61 U11.3 ; 36.11,10.57 37.82,8.86 U17.4 U17.5 U17.6
  BOTTOM w0.508: U8.4 U8.3 38.73,19.99 38.74,20 C33.2 ; U8.4 41.43,19 ; U8.4 U8.5 v2(42.08,18.05)
VDD_SDIO: length 19.4
  TOP w0.127: U2.26 11.37,32.07 11.37,33.24 11.41,33.27
  TOP w0.229: 11.76,34.35 11.76,33.62 11.41,33.27
  TOP w0.508: U3.8 10.87,36.16 10.87,36.76 11.15,37.05 C24.1 ; v3(12.17,36.69) 11.55,36.07 11.55,34.56 11.76,34.35
  TOP w0.635: C24.1 11.84,37.03 v3(12.17,36.69) ; U4.8 15.49,40.66 R10.1 16.2,40.14 v3(16.25,40.14) 16.89,39.5 C62.1 ; R4.1 12.73,36.15
  TOP w0.762: R4.1 12.2,36.69 v3(12.17,36.69) 12.17,36.71 C24.1
  SIG w0.635: v3(12.17,36.69) 14.18,38.7 14.81,38.7 15.24,39.12 15.24,39.13 15.65,39.54 15.65,39.54 v3(16.25,40.14)
B: length 29.1
  TOP w0.127: U2.34 8.21,31.27 8.21,31.61 6.95,32.87 v1(5.65,32.87)
  SIG w0.127: v1(5.65,32.87) 5.63,32.87
  SIG w0.203: v1(17.19,47.6) 16.7,48.09 13.09,48.09 5.13,40.14 5.13,33.37 5.63,32.87
  BOTTOM w0.203: Q5.1 17.19,47.59 v1(17.19,47.6)
CAM_RESET: length 21.5
  TOP w0.127: v1(24.29,14.67) 24.29,14.06 24.55,13.81 R35.2 25.09,13.36 25.1,13.36 C52.1 ; v1(18.28,25.08) 17.97,25.39 17.29,25.39 16.98,25.71 16.62,26.06 16.62,27.09 15.88,27.84 15.52,27.84 15.2,28.15 U2.13
  SIG w0.127: v1(18.28,25.08) 18.02,25.08 17.75,24.81 17.75,23.52 23.34,17.94 v1(24.15,17.94)
  BOTTOM w0.127: v1(24.15,17.94) 24.15,17.4 24.01,17.25 J2.6 24.01,14.95 v1(24.29,14.67)
DOVDD_3V3: length 135.2
  TOP w0.127: C19.1 15.5,31.83 15.5,31.68 14.52,30.7 14.38,30.7 U2.19
  TOP w0.203: U2.1 12.23,25.27 12,25.03 12,23.61 11.99,23.6 ; R16.1 v1(20.3,40.4)
  TOP w0.229: U2.43 9.73,26.54 9.73,26.53 9.22,26.01 v2(8.59,26.01) ; v2(10.29,24.78) 10.29,25.61 10.47,25.79 10.47,25.8 U2.46 ; U2.37 8.95,29.05 7.79,30.21 v2(7.21,30.21) ; 11.99,23.6 12.27,23.32
  TOP w0.381: v2(8.59,26.01) 7.5,26.01 7.03,26.48 7.03,27.76 C13.1 6.16,28.64 C20.1 5.76,29.04 5.76,29.97 C48.1 6.99,30.43 v2(7.21,30.21) ; R36.2 v2(23.51,11.73) ; R36.2 24.55,12.47 R35.1 ; R36.2 23.5,12.47 R37.2 ; v2(28.56,14.14) 28.57,14.13 28.57,13.34 C36.1 29.42,13.33 C34.1
  TOP w0.508: C50.1 39.01,22.11 C12.1 38.03,22.1 31.46,15.53 29.95,15.53 v2(28.56,14.14) ; R89.1 v2(23.31,36.48)
  TOP w0.635: 13.41,21.98 v2(13.41,21.24) C3.1 13.49,19.79 C4.1 ; 13.41,21.98 12.27,23.12 12.27,23.32 ; 13.41,21.98 13.45,21.95 ; R9.1 16.63,32.91 C10.1 ; R9.1 15.83,33.67 C11.1 15.79,33.71 v2(15.31,34.19) ; R9.1 15.82,32.15 C19.1
  TOP w0.762: v3(32.81,36.43) C60.1 30.59,36.43 30.59,36.44 U25.4
  TOP w1.016: v3(32.81,36.43) 37.72,31.53 U11.4 ; C60.1 31.51,36.44 ; U11.4 37.72,25.27 39.01,23.98 C50.1 ; U11.4 U11.2
  SIG w0.381: v2(28.56,14.14) 26.15,11.73 v2(23.51,11.73)
  SIG w0.635: 11.27,25.72 10.33,24.78 v2(10.29,24.78)
  SIG w0.762: 10.23,26.76 13.41,23.58 v2(13.41,21.24) ; 10.23,26.76 9.48,26.01 v2(8.59,26.01) ; 10.23,26.76 8.63,28.36 8.63,30.21 ; v2(15.31,34.19) 13.8,34.19 13.78,34.21 9.78,30.21 8.63,30.21 ; v2(7.21,30.21) 7.27,30.21 7.28,30.22 7.91,30.22 7.92,30.21 8.63,30.21
  BOTTOM w0.203: v1(20.3,40.4) 20.3,39.05 21.41,37.95 22.49,37.95 23.31,37.12 v2(23.31,36.48)
  BOTTOM w0.254: v2(28.56,14.14) 27.26,14.14 26.51,14.89 26.51,14.89 J2.11
  BOTTOM w0.508: L5.2 13.61,24.34 C9.1 12.92,23.64 13.41,23.14 13.41,22 v2(13.41,21.24)
  BOTTOM w0.762: v3(32.81,36.43) 31.8,36.43 31.75,36.48 v2(23.31,36.48) 21.03,34.19 v2(15.31,34.19)
DTR: length 9
  BOTTOM w0.203: J51.3 28.83,42.98 28.83,42.31 27.08,40.57 Q2.2 26.22,40.57 26.22,40.57 26.21,40.57 25.99,40.79 25.99,41.61 25.69,41.91 R21.1
DVP_HREF: length 21.9
  TOP w0.127: U2.5 13.72,25.76 14.41,25.76 19.57,20.61 19.57,18.27 19.57,18.27 19.57,17.41 19.57,17.09 20.42,16.23 v1(21,16.23)
  SIG w0.127: v1(22.02,17.91) 21,16.89 v1(21,16.23)
  BOTTOM w0.127: J2.9 25.51,17.99 25,18.49 22.6,18.49 v1(22.02,17.91)
DVP_PCLK: length 21.5
  TOP w0.127: v1(18.22,24.42) 17.65,25 17.33,25 16.73,25.6 16.37,25.96 16.37,26.99 15.77,27.58 15.35,27.58 14.96,27.97 U2.12
  SIG w0.127: v1(29.51,17.52) 26.49,17.52 25.63,18.38 23.25,18.38 18.22,23.41 v1(18.22,24.42)
  BOTTOM w0.127: v1(29.51,17.52) 29.51,17.44 29.51,17.43 29.51,17.28 29.51,17.28 J2.17
DVP_VSYNC: length 20.5
  TOP w0.127: U2.15 15.53,29.87 15.95,29.87 v1(16.61,29.21)
  SIG w0.127: v1(16.61,29.21) 16.61,28.2 17.24,27.57 17.24,23.31 23.37,17.19 24.71,17.19 v1(25.03,17.5)
  BOTTOM w0.127: v1(25.03,17.5) 24.69,17.5 24.5,17.32 24.5,17.16 24.51,17.16 J2.7
DVP_Y2: length 28.6
  TOP w0.127: v1(31.49,18.26) 31.49,17.27 31.11,16.88 29.96,16.88 29.25,16.17 21.94,16.17 21.79,16.32 21.44,16.67 20.34,16.67 19.82,17.19 19.82,17.51 19.82,20.71 14.51,26.02 13.96,26.02 U2.6
  BOTTOM w0.127: v1(31.49,18.26) 31.02,18.26 30.51,17.74 J2.19
DVP_Y3: length 38.5
  TOP w0.127: U2.17 14.88,30.21 14.88,30.21 15.45,30.77 v1(15.9,30.77)
  BOTTOM w0.127: J2.21 31.51,11.79 30.39,10.68 22.85,10.68 20.57,12.95 20.57,15.61 19.69,16.49 19.69,16.64 19.68,16.65 19.68,20.67 16.58,23.77 16.58,27.34 15.61,28.31 15.61,30.04 15.9,30.33 v1(15.9,30.77)
DVP_Y4: length 39.7
  TOP w0.127: U2.20 14.27,31.08 14.27,31.09 v1(14.58,31.4)
  BOTTOM w0.127: J2.22 32.01,11.93 30.5,10.43 22.74,10.43 20.32,12.85 20.32,15.5 19.44,16.38 19.44,16.5 19.43,16.51 19.43,20.56 16.17,23.83 16.17,27.39 15.57,27.98 15.57,27.99 15.36,28.21 15.36,30.63 v1(14.58,31.4)
DVP_Y5: length 27.3
  TOP w0.127: v1(17.21,28.57) 17.21,29.25 16.31,30.16 15.32,30.16 U2.16
  SIG w0.127: v1(17.21,28.57) 17.21,28.13 17.5,27.84 17.5,23.42 23.42,17.5 24.37,17.5 24.88,18.01 25.65,18.01 26.58,17.08 30.48,17.08 v1(31,17.6)
  BOTTOM w0.127: v1(31,17.6) 31,16.17 J2.20
DVP_Y6: length 25.7
  TOP w0.127: v1(30.33,18.23) 30.33,17.6 29.14,16.42 22.06,16.42 20.33,18.16 20.33,20.92 14.73,26.53 14.44,26.53 13.97,26.99 U2.8
  BOTTOM w0.127: v1(30.33,18.23) 30.01,17.91 J2.18
DVP_Y7: length 24.3
  TOP w0.127: v1(29.33,18.43) 28.05,18.43 26.55,16.93 22.27,16.93 20.84,18.37 20.84,21.13 17.23,24.74 16.12,25.85 16.12,26.88 15.67,27.33 15.12,27.33 14.71,27.74 U2.11
  BOTTOM w0.127: J2.16 29.01,18.11 v1(29.33,18.43)
DVP_Y8: length 23.1
  TOP w0.127: U2.10 14.88,27.08 15.56,27.08 15.86,26.77 15.86,25.75 17.12,24.49 20.58,21.03 20.58,18.26 22.17,16.68 27.08,16.68 28.05,17.65 28.05,17.65 v1(28.36,17.96)
  BOTTOM w0.127: J2.14 28.01,17.16 28.36,17.52 v1(28.36,17.96)
DVP_Y9: length 21.4
  TOP w0.127: U2.7 14.2,26.27 14.62,26.27 20.07,20.82 20.07,18.06 20.07,17.56 20.38,17.25 v1(20.43,17.25)
  SIG w0.127: v1(20.43,17.25) 20.75,17.57 20.75,17.57 v1(21.51,18.33)
  BOTTOM w0.127: J2.12 27.01,17.16 25.36,18.8 21.98,18.8 21.82,18.64 v1(21.51,18.33)
EN: length 39.8
  TOP w0.127: v1(15.4,26.52) 15.15,26.78 14.67,26.78 14.21,27.24 U2.9 ; v1(17.69,29.98) 19.36,31.65 19.36,38.5 v1(18.64,39.21) 18.64,39.91 18.69,39.96 R16.2
  TOP w0.203: U25.6 29.41,39.2 29.4,39.21 ; 29.4,39.21 30.79,39.21 31.9,40.32 v1(31.9,42.37) ; 29.4,39.21 v1(18.64,39.21) ; R16.2 18.69,41.02 18.7,41.03 C22.1 18.7,42.65 17.97,43.38 SW2.2
  SIG w0.127: v1(17.69,29.98) 16.7,29.98 16.08,29.36 16.08,27.2 v1(15.4,26.52)
  BOTTOM w0.254: v1(31.9,42.37) 31.1,42.37 Q1.3
FLASH_CLK: length 4.1
  TOP w0.127: U3.6 9.51,32.96 9.51,31.46 U2.31
G: length 26.1
  TOP w0.127: v1(7.62,29.38) 8.12,29.38 U2.38
  SIG w0.127: v1(7.62,29.38) 7.13,29.38 6.34,30.17 6.34,32.21 6.61,32.47 6.61,33.26 6.34,33.53 6.34,36.65 5.88,37.12 5.88,39.7 v1(6.96,40.79)
  BOTTOM w0.127: Q4.1 13.76,49.29 13.76,49.28 6.96,42.48 v1(6.96,40.79)
I2C_SCL: length 35.5
  TOP w0.127: v1(23.66,14.16) 23.51,14.02 R36.1 ; v1(6.97,31.34) 7.46,30.84 7.65,30.84 U2.36
  BOTTOM w0.127: v1(6.97,31.34) 7.7,32.06 8.11,32.06 8.16,32.11 15.62,32.11 16.6,31.12 16.6,30.05 16.45,29.91 16.13,29.58 16.13,28.51 17.09,27.55 17.09,23.98 20.2,20.87 20.2,18.89 21.66,17.44 23.23,17.44 23.51,17.16 J2.5 23.51,15.2 23.65,15.06 23.65,14.61 23.66,14.61 v1(23.66,14.16)
I2C_SDA: length 34.6
  TOP w0.127: v1(22.33,14.17) 22.51,14 R37.1 ; v1(7.7,31.29) 8.01,30.97 U2.35
  SIG w0.127: v1(22.33,14.17) 21.88,14.17 v1(21.04,15.01)
  BOTTOM w0.127: v1(7.7,31.29) 8.26,31.85 15.51,31.85 16.35,31.02 16.35,30.16 15.87,29.69 15.87,28.41 16.84,27.44 16.84,23.87 19.94,20.77 19.94,16.59 21.04,15.5 v1(21.04,15.01) ; v1(22.33,14.17) 22.33,14.98 22.51,15.16 22.51,15.17 22.51,15.17 J2.3
IO0: length 35.4
  TOP w0.203: U2.23 13.5,31.8 13.5,33.89 v1(15.01,35.39) ; v1(25.97,42.42) 25.97,41.55 24.85,40.43 v1(21.7,40.43) ; v1(21.7,38.68) 21.7,36.93 21.69,36.92 v1(21.69,36.44)
  TOP w0.254: v1(21.7,40.43) 21.7,41.31 22.65,42.25 22.65,49.7 22.01,50.33 SW1.2
  SIG w0.203: v1(15.01,35.39) 17.07,35.39 17.26,35.21 20.46,35.21 v1(21.69,36.44)
  BOTTOM w0.203: Q2.3 v1(25.97,42.42) ; v1(21.7,40.43) v1(21.7,38.68)
IO12: length 3.9
  TOP w0.127: R9.2 16.18,31.24 15.41,31.24 U2.18
IO16: length 19.5
  TOP w0.127: U2.25 12.96,33.06 12.96,34.33 14.72,36.09 15.53,36.09 16.55,37.12 16.55,38.52 R10.2 14.73,40.34 14.73,40.5 12.67,42.56 12.67,43.48 U4.1
IO17: length 12.2
  TOP w0.127: v1(11.1,34.08) 11.1,31.85 11.42,31.53 U2.27 ; U4.6 11.39,41.17 10.88,41.17 v1(10.11,40.4)
  SIG w0.127: v1(10.11,40.4) 11.1,39.4 v1(11.1,34.08)
IO21: length 39.5
  TOP w0.127: U2.42 9.36,26.67 v1(7.74,26.67)
  SIG w0.127: v1(5.81,35.96) 5.81,35.51 6.08,35.25 6.08,33.43 6.35,33.16 6.35,32.58 6.08,32.31 6.08,28.33 v1(7.74,26.67)
  BOTTOM w0.127: v1(5.81,35.96) 7.72,37.87 15.91,37.87 16.21,38.16 16.26,38.16 17.08,38.98 17.08,40.49 15.88,41.68 15.88,47.44 18.48,50.04 18.48,51.07 18.53,51.12 Q3.1
IO25: length 19.9
  TOP w0.127: v1(18.77,23.97) 18.77,25.21 18.34,25.65 17.4,25.65 17.23,25.81 16.88,26.17 16.88,27.2 15.98,28.09 15.76,28.09 15.45,28.4 U2.14
  SIG w0.127: v1(26.8,18.02) 26.35,18.02 25.73,18.64 23.36,18.64 18.77,23.22 v1(18.77,23.97)
  BOTTOM w0.127: v1(26.8,18.02) 27.25,18.02 27.51,17.76 J2.13
LED_B: length 110.8
  SIG w0.508: v2(39.18,12.94) 38.42,12.94 35.34,9.86 25.33,9.86 v2(22.14,6.67)
  BOTTOM w0.254: Q5.3 20.69,47.74 20.69,50.14 21.08,50.52 R74.1
  BOTTOM w0.508: R86.1 11.38,13.69 11.38,13.62 12.64,12.35 14.09,12.35 15.03,11.41 15.7,11.41 20.42,6.69 21.36,6.69 21.38,6.67 v2(22.14,6.67) 22.88,5.93 22.88,4.9 R77.1 ; R80.1 48.95,22.66 ; 48.95,22.66 47.16,24.44 47.16,32.79 arc(46.59,35.67) 44.96,38.11 39.1,43.97 39.1,44.52 39.9,45.32 40.01,45.32 R83.1 38.3,48.03 arc(36.39,49.31) 34.13,49.76 23.27,49.76 22.76,50.27 R74.1 ; 48.95,22.66 47.67,21.38 arc(47.34,20.89) 47.23,20.32 arc(46.98,19.08) 46.28,18.03 42.56,14.31 arc(42.12,13.66) 41.97,12.89 41.97,12.23 arc(41.92,11.97) 41.77,11.75 41.14,11.12 arc(40.53,10.71) R71.1 39.18,11.21 v2(39.18,12.94)
LED_G: length 122.3
  SIG w0.508: v2(20.9,4.14) 25.71,8.96 30.72,8.96 v2(35.02,4.66)
  BOTTOM w0.254: Q4.3 16.77,49.69 16.77,51.55 17.83,52.61 19.35,52.61 19.93,52.03 R75.1
  BOTTOM w0.508: R78.1 20.98,3.04 20.98,4.06 v2(20.9,4.14) 14.63,10.41 12.14,10.41 R87.1 ; v2(35.02,4.66) 40.08,9.72 40.76,9.72 R72.1 42.63,10.7 arc(42.8,10.95) 42.86,11.25 arc(43.22,13.05) 44.23,14.57 50.32,20.66 51.17,20.66 51.43,20.4 R81.1 51.89,20.85 arc(52.05,21.23) 51.89,21.61 48.33,25.17 arc(48.14,25.45) 48.07,25.78 48.07,28.5 arc(48.37,29.99) 49.21,31.25 arc(50.6,33.33) 51.09,35.79 arc(50.99,36.28) 50.71,36.71 41.46,45.95 41.46,46.75 R84.1 40.56,48.28 arc(37.27,50.48) 33.38,51.26 23.41,51.26 22.77,51.89 R75.1
LED_R: length 126.2
  TOP w0.254: v1(21.66,51.46) v1(21.66,53.54)
  SIG w0.508: v2(20.13,2.25) 25.99,8.12 29.72,8.12 v2(35.48,2.36)
  BOTTOM w0.254: v1(21.66,51.46) 20.99,51.46 20.51,50.98 Q3.3 ; R76.1 22.02,53.54 v1(21.66,53.54)
  BOTTOM w0.508: v2(35.48,2.36) 41.51,8.39 42.22,8.39 42.58,8.03 R73.1 43.37,8.8 arc(43.78,9.42) 43.93,10.15 43.93,11.09 arc(44.06,11.78) 44.46,12.36 48.69,16.6 48.71,16.6 49.15,17.05 49.15,17.06 51.23,19.14 52.14,19.14 52.24,19.04 R82.1 arc(53.28,20.03) 53.51,21.2 53.51,22.43 arc(53.25,23.06) 52.61,23.33 52.03,23.33 arc(51.37,23.46) 50.81,23.83 49.33,25.31 arc(49.05,25.74) 48.95,26.24 48.95,27.76 arc(49.28,29.44) 50.23,30.86 51.44,32.07 arc(52.23,33.25) 52.51,34.64 arc(51.97,37.33) 50.45,39.6 42.74,47.31 42.74,48.03 43.1,48.39 R85.1 arc(38.29,51.62) 32.62,52.75 23.23,52.75 22.72,53.26 R76.1 ; R79.1 v2(20.13,2.25) 13.89,8.49 11.26,8.49 R88.1
PWDN: length 4
  TOP w0.127: R34.2 26.08,13.83 25.4,13.83 v1(24.89,14.34)
  BOTTOM w0.127: v1(24.89,14.34) 24.89,14.93 25.01,15.04 J2.8
RTS: length 9.9
  TOP w0.203: v1(30.15,39.9) 30.73,39.9 31.22,40.39 31.22,42.41 31.66,42.85 32.47,42.85 v1(32.96,42.36)
  BOTTOM w0.203: J51.4 33.34,43.98 33.43,43.9 33.43,43.82 33.97,43.28 R70.1 33.49,42.36 33.49,42.36 v1(32.96,42.36) ; Q1.2 v1(30.15,39.9)
RXD0: length 41.6
  TOP w0.127: U2.40 8.94,27.24 8.67,27.24 v1(8.36,27.56)
  SIG w0.203: J51.2 28.26,43.98 28.26,43.97 28.26,38.32 27.66,37.73 16.73,37.73 15.32,36.31 v1(14.09,36.31)
  BOTTOM w0.203: v1(14.09,36.31) 13.68,35.9 7.46,35.9 4.39,32.83 4.39,30.69 7.14,27.94 7.98,27.94 v1(8.36,27.56)
SCS/CMD: length 11
  TOP w0.127: v1(9.94,33.35) 9.94,31.52 10.26,31.2 U2.30 ; v1(7.1,38.95) 6.98,39.08 6.98,39.08 U3.1
  SIG w0.127: v1(9.94,33.35) 9.94,33.8 9.94,36.12 v1(7.1,38.95)
SDI/SD1: length 13.9
  TOP w0.127: U2.33 8.47,31.51 8.47,32.2 U3.5 ; U3.5 7.68,32.98 7.46,33.21 ; U3.5 6.28,34.39 6.28,35.36 9.99,39.08 10.99,39.08 U4.5
SDO/SD0: length 21.1
  TOP w0.127: U3.2 6.28,37.98 6.29,37.98 v1(6.61,37.66) 9.59,40.65 9.59,40.66 9.86,40.92 9.86,40.92 10.77,41.83 10.77,43.58 9.73,44.62 U4.2 ; U2.32 9,31.47 9,32.11 8.99,32.11 v1(8.99,32.55)
  SIG w0.127: v1(6.61,37.66) 6.92,37.35 6.92,37.35 9,35.27 9,33 8.99,33 v1(8.99,32.55)
SHD/SD2: length 17.2
  TOP w0.127: U2.28 10.76,31.69 10.76,32.64 10.85,32.74 10.85,33.41 U3.7 8.56,35.71 8.56,36.75 v1(10.23,38.43) ; v1(11.66,42.69) 12.07,42.29 12.07,42.28 U4.7
  SIG w0.127: v1(11.66,42.69) 11.22,42.69 11.12,42.6 11.12,42.6 9.04,40.52 9.04,39.62 v1(10.23,38.43)
SWP/SD3: length 22.1
  TOP w0.127: U2.29 10.4,31.55 v1(10.4,32.92) ; U3.3 5.82,36.65 6.61,36.65 v1(8.6,38.63) ; U4.3 v1(9.87,42.69)
  SIG w0.127: v1(9.87,42.69) 7.82,40.64 7.82,39.41 v1(8.6,38.63) 10.4,36.83 v1(10.4,32.92)
TXD0: length 5
  BOTTOM w0.203: J51.1 24.75,44.96 24.74,44.95 24.03,44.95 23.35,44.28 R3.2
WDI: length 30.5
  TOP w0.127: v1(7.11,28.73) 7.66,28.19 8.99,28.19 U2.39
  TOP w0.203: v1(22.25,37.15) 23.1,37.15 23.32,37.38 R89.2 24.28,38.04 24.59,38.34 U25.1
  SIG w0.127: v1(12.42,34.67) 12.94,34.67 13.17,34.9 20.85,34.9 22.25,36.31 v1(22.25,37.15)
  BOTTOM w0.127: v1(7.11,28.73) 6.21,29.63 6.21,32.28 8.61,34.67 v1(12.42,34.67)
N16860839: length 7.3
  TOP w0.127: U2.48 11.42,25.76 11.19,25.53 11.19,24.05 11.52,23.73 11.52,22.84 12.16,22.2 12.16,21.72 C6.2 11.38,20.93 11.38,20.92 R1.2 10.56,20.11 10.56,20.06 C5.1
N16860948: length 3.9
  TOP w0.203: U2.4 13.67,25.32 13.17,25.32 U2.3
  TOP w0.508: 13.67,25.32 13.92,25.32 v2(14.65,24.59)
  BOTTOM w0.508: v2(14.65,24.59) 14.25,24.99 L5.1
N16861170: length 7.6
  TOP w0.229: J39.1 16,16.19 ; 16,16.19 15.99,16.18 ; 16,16.19 17.46,17.65 arc(18.06,19.1) 17.46,20.55 C15.2 16.58,21.43 16.58,21.44 16.17,21.85 16.16,21.85 C14.2
N16861179: length 7.3
  TOP w0.127: U2.44 7.55,23.87 5.89,23.87 U1.3 4.84,24.92 C2.1
N16861214: length 3.9
  TOP w0.254: 8.58,23.44 9.18,22.84 R2.1 ; 8.58,23.44 8.58,21.99 C1.1 ; 8.58,23.44 U1.1
N16861260: length 5.4
  TOP w0.127: U2.47 10.86,25.7 10.86,23.97 11.22,23.61 C6.1 10.9,21.73 10.9,21.73 R1.1
N16861530: length 34.4
  TOP w0.127: v1(7.64,27.45) 8.15,26.94 9.13,26.94 9.68,27.49 U2.41
  SIG w0.203: v1(23.34,38.32) 22.86,38.32 22.7,38.17 18.58,38.17 18.5,38.24 v1(18.02,38.24)
  BOTTOM w0.203: R3.1 23.35,40.55 23.37,40.53 23.37,38.38 23.34,38.36 v1(23.34,38.32) ; v1(18.02,38.24) 17.35,37.58 8.13,37.58 4.02,33.46 4.02,30.59 7.15,27.45 v1(7.64,27.45)
N16861598: length 4.8
  TOP w0.127: R2.2 9.08,24.21 9.08,24.91 U2.45
N16884685: length 3.8
  TOP w0.229: U2.2 12.48,25.51 L4.1 15.14,22.84 C14.1
N16908427: length 6.1
  BOTTOM w0.203: R70.2 33.49,41.46 33.46,41.43 28.91,41.43 28.55,41.07 Q2.1
N16908429: length 9.4
  BOTTOM w0.203: Q1.1 32.05,39.75 31.51,39.22 25.77,39.22 25.05,39.94 R21.2
N16960286: length 6.6
  TOP w0.508: U17.3 40.65,6.04 U17.3 ; U17.3 39.48,7.21 39.48,9.53 v1(38.4,10.61)
  BOTTOM w0.508: R71.2 38.5,10.61 v1(38.4,10.61)
N16960306: length 5.2
  TOP w0.508: U17.2 v1(38.27,6.3)
  BOTTOM w0.508: v1(38.27,6.3) 38.71,6.75 38.71,6.78 R72.2
N16960332: length 8.3
  TOP w0.508: v2(37.29,2.73) 37.34,2.73 U17.1
  BOTTOM w0.508: R73.2 v2(37.29,2.73)
N16960785: length 4.8
  TOP w0.254: v1(26.9,50.52) 25.31,50.52 U18.3
  BOTTOM w0.254: R74.2 v1(26.9,50.52)
N16960795: length 4.8
  TOP w0.254: v1(26.91,52.03) 25.31,52.03 U18.2
  BOTTOM w0.254: R75.2 v1(26.91,52.03)
N16960797: length 5.6
  TOP w0.254: U18.1 26.56,53.52 26.57,53.54 v1(27.27,53.54)
  BOTTOM w0.254: R76.2 v1(27.27,53.54)
N16961158: length 5.3
  TOP w0.508: v2(21.01,5.34) 20.47,4.8 18.48,4.8 U19.3
  BOTTOM w0.508: v2(21.01,5.34) 21.07,5.28 21.07,5.25 R77.2
N16961160: length 5.7
  TOP w0.508: U19.2 v2(17.53,5.97)
  BOTTOM w0.508: v2(17.53,5.97) 18.07,5.43 18.39,5.43 R78.2
N16961162: length 8.7
  TOP w0.508: v2(13.8,6.79) 13.89,6.79 U19.1
  BOTTOM w0.508: R79.2 18.23,2.36 v2(13.8,6.79)
N16961522: length 5.9
  TOP w0.508: v1(49.02,21.29) 49.82,20.49 49.82,18.09 U20.3
  BOTTOM w0.508: v1(49.02,21.29) 49.04,21.29 R80.2
N16961524: length 5.6
  TOP w0.508: U20.2 49.9,15.85 v2(48.39,17.36)
  BOTTOM w0.508: v2(48.39,17.36) 48.93,17.9 48.94,17.9 R81.2
N16961526: length 8
  TOP w0.508: U20.1 v2(47.77,13.69)
  BOTTOM w0.508: R82.2 48.31,14.73 48.31,14.23 v2(47.77,13.69)
N16961899: length 7
  TOP w0.508: U21.3 43.75,45.81 43.03,45.81 42.6,46.23 41.89,46.23 v2(40.21,44.56)
  BOTTOM w0.508: R83.2 40.52,44.56 v2(40.21,44.56)
N16961901: length 4.9
  TOP w0.508: v2(44.48,44.36) 44.48,44.42 U21.2
  BOTTOM w0.508: R84.2 43.94,44.9 43.94,44.9 v2(44.48,44.36)
N16961903: length 7.4
  TOP w0.508: v2(47.91,43.6) 47.91,43.66 46.88,44.69 U21.1
  BOTTOM w0.508: R85.2 v2(47.91,43.6)
N16962291: length 5
  TOP w0.508: U22.3 7.29,14.63 9.24,14.63 v1(9.69,14.18)
  BOTTOM w0.508: v1(9.69,14.18) 9.84,14.33 9.85,14.33 R86.2
N16962293: length 5.5
  TOP w0.508: U22.2 6.54,16 v2(6.55,16)
  BOTTOM w0.508: v2(6.55,16) 8.59,13.96 8.59,13.96 R87.2
N16962295: length 7.2
  TOP w0.508: U22.1 3.31,16.43 v2(3.31,16.45)
  BOTTOM w0.508: v2(3.31,16.45) 3.85,15.91 3.85,15.89 R88.2
N16988764: length 1.6
  TOP w0.508: C61.1 26.13,36.45 26.13,36.44 U25.3

## Copper pours and planes (outline as drawn; the poured copper is in the pictures)
AGND on TOP: 23.96,0.14 8.02,7.87 0.14,23.74 1.63,23.74 1.63,23.74 5.04,27.38 1.51,30.89 0.14,30.89 27.28,54.69 54.42,30.89 53.06,30.89 49.52,27.29 53.1,23.74 54.42,23.74 46.55,7.87 30.61,0.14 30.61,1.5 27.28,4.83 23.96,1.5 ; 8 cut-outs
AGND on BOTTOM: 23.96,0.14 8.02,7.87 0.14,23.74 1.63,23.74 1.63,23.74 5.04,27.38 1.51,30.89 0.14,30.89 27.28,54.69 54.42,30.89 53.06,30.89 49.52,27.29 53.1,23.74 54.42,23.74 46.55,7.87 30.61,0.14 30.61,1.5 27.28,4.83 23.96,1.5 ; 11 cut-outs
AGND on GND: 23.96,0.14 8.02,7.87 0.14,23.74 1.63,23.74 1.63,23.74 5.04,27.38 1.51,30.89 0.14,30.89 27.28,54.69 54.42,30.89 53.06,30.89 49.52,27.29 53.1,23.74 54.42,23.74 46.55,7.87 30.61,0.14 30.61,1.5 27.28,4.83 23.96,1.5
AGND on SIG: 23.96,0.14 8.02,7.87 0.14,23.74 1.63,23.74 1.63,23.74 5.04,27.38 1.51,30.89 0.14,30.89 27.28,54.69 54.42,30.89 53.06,30.89 49.52,27.29 53.1,23.74 54.42,23.74 46.55,7.87 30.61,0.14 30.61,1.5 27.28,4.83 23.96,1.5 ; 3 cut-outs

## Text on the board
Ref Des/Silkscreen Bottom: TXD | RXD | DTR | RTS | GND | 5V
User.Comments: tTXD
Ref Des/Silkscreen Top: RST | DL | TXD | RXD | DTR | RTS | GND | 5V
NCLEGEND-1-4: FIGURE | SIZE | 12.0 | 20.0 | 25.0 | 35.429 | 35.433 | DRILL CHART: TOP to BOTTOM | ALL UNITS ARE IN MILS | PLATED | QTY | 475 | 32 | 3 | 6 | 2
